# Altium PCB cps.PcbDoc
Units mm, origin at the board's own origin, x right, y up, seen from the top; angles counter-clockwise.
Board outline 54 x 58 mm, 2 copper layers (Top Layer, Bottom Layer); 6 components, 5 nets, 34 pads, 0 vias.
Unrouted connection lines stored in the file: 2.
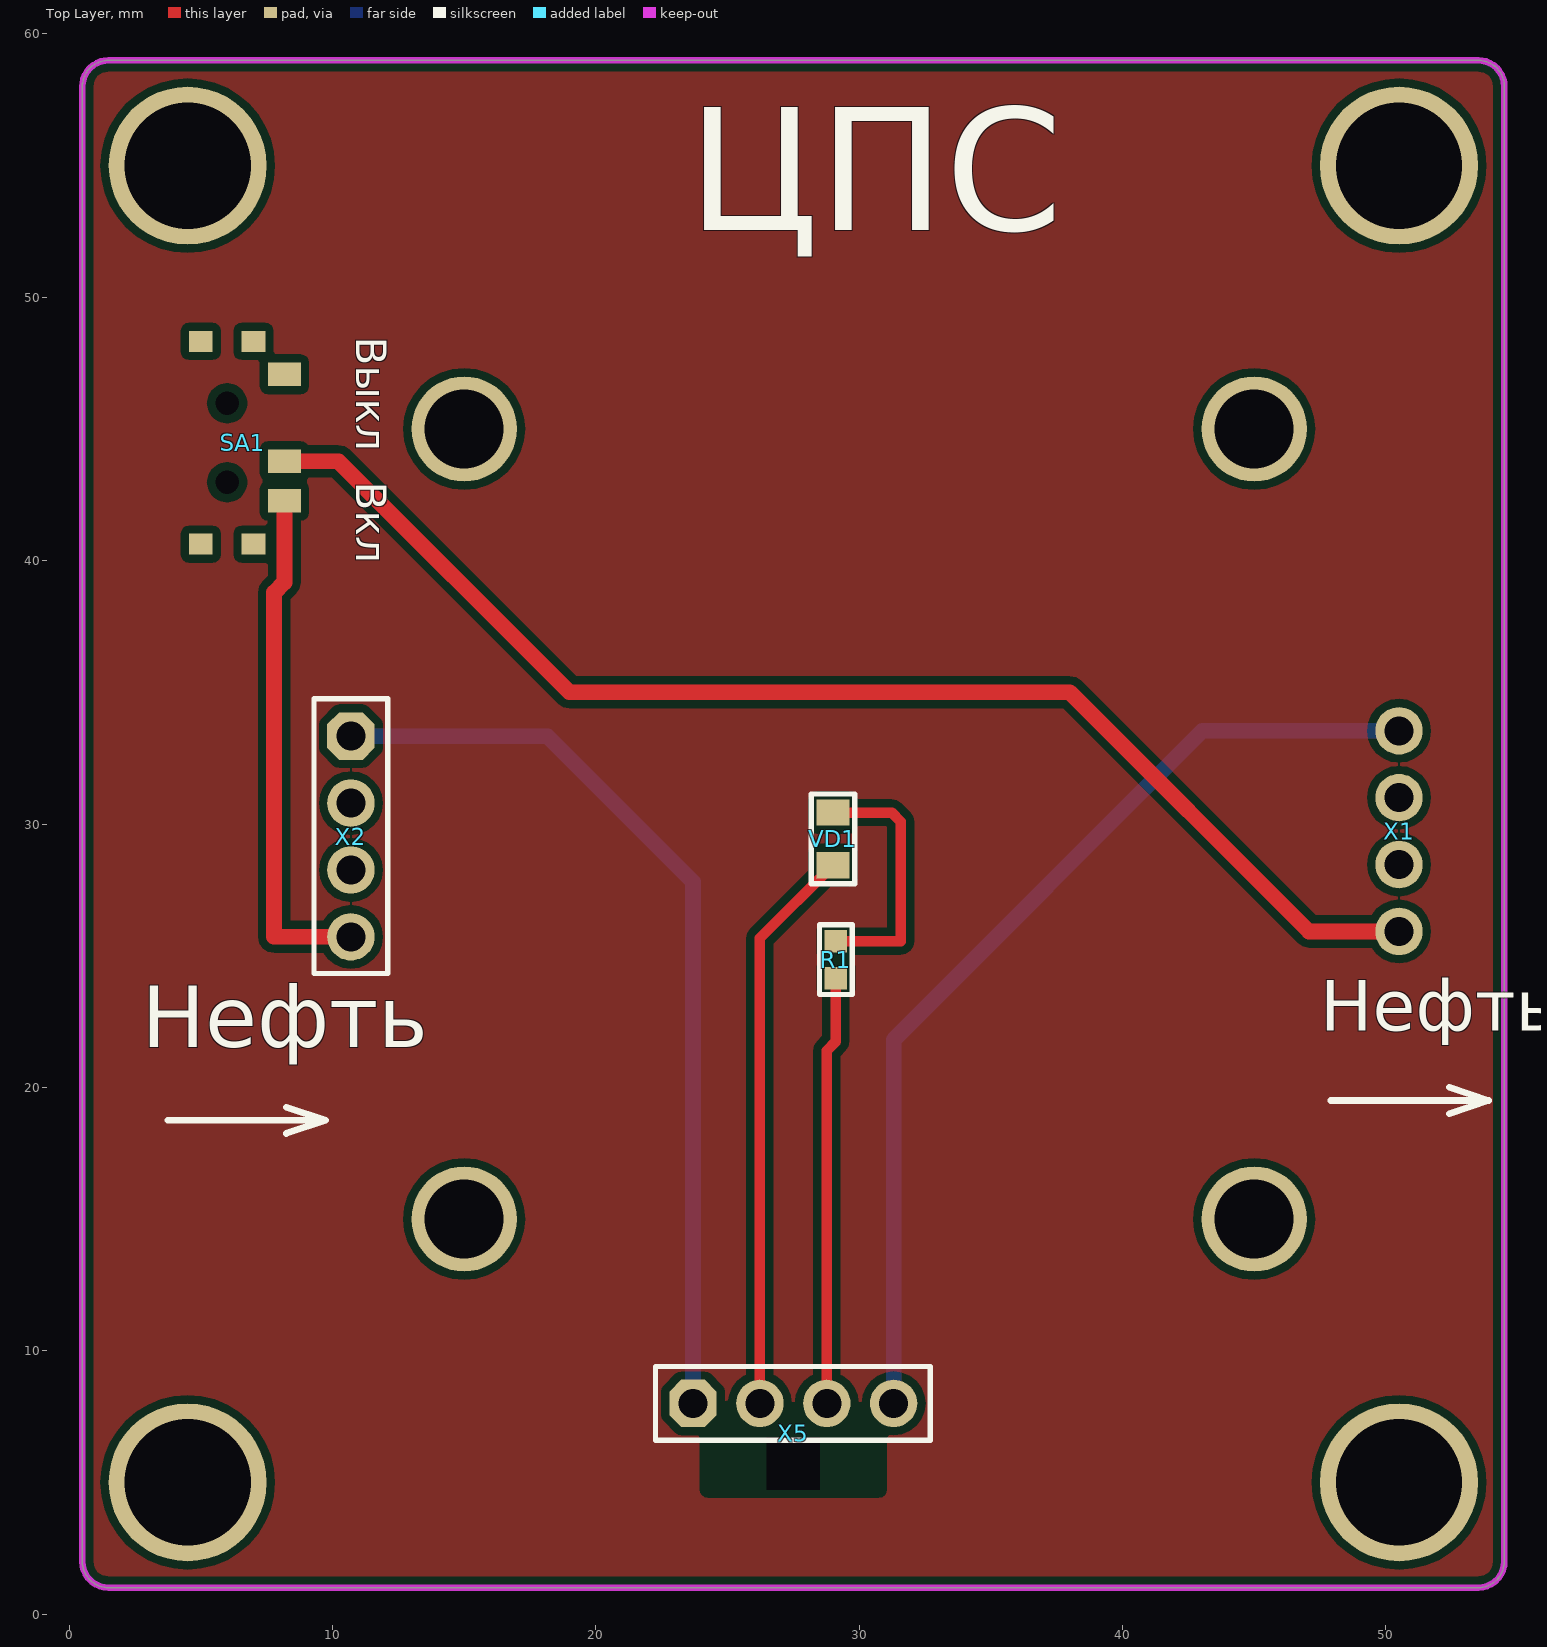
[diagram p0: Top Layer view]
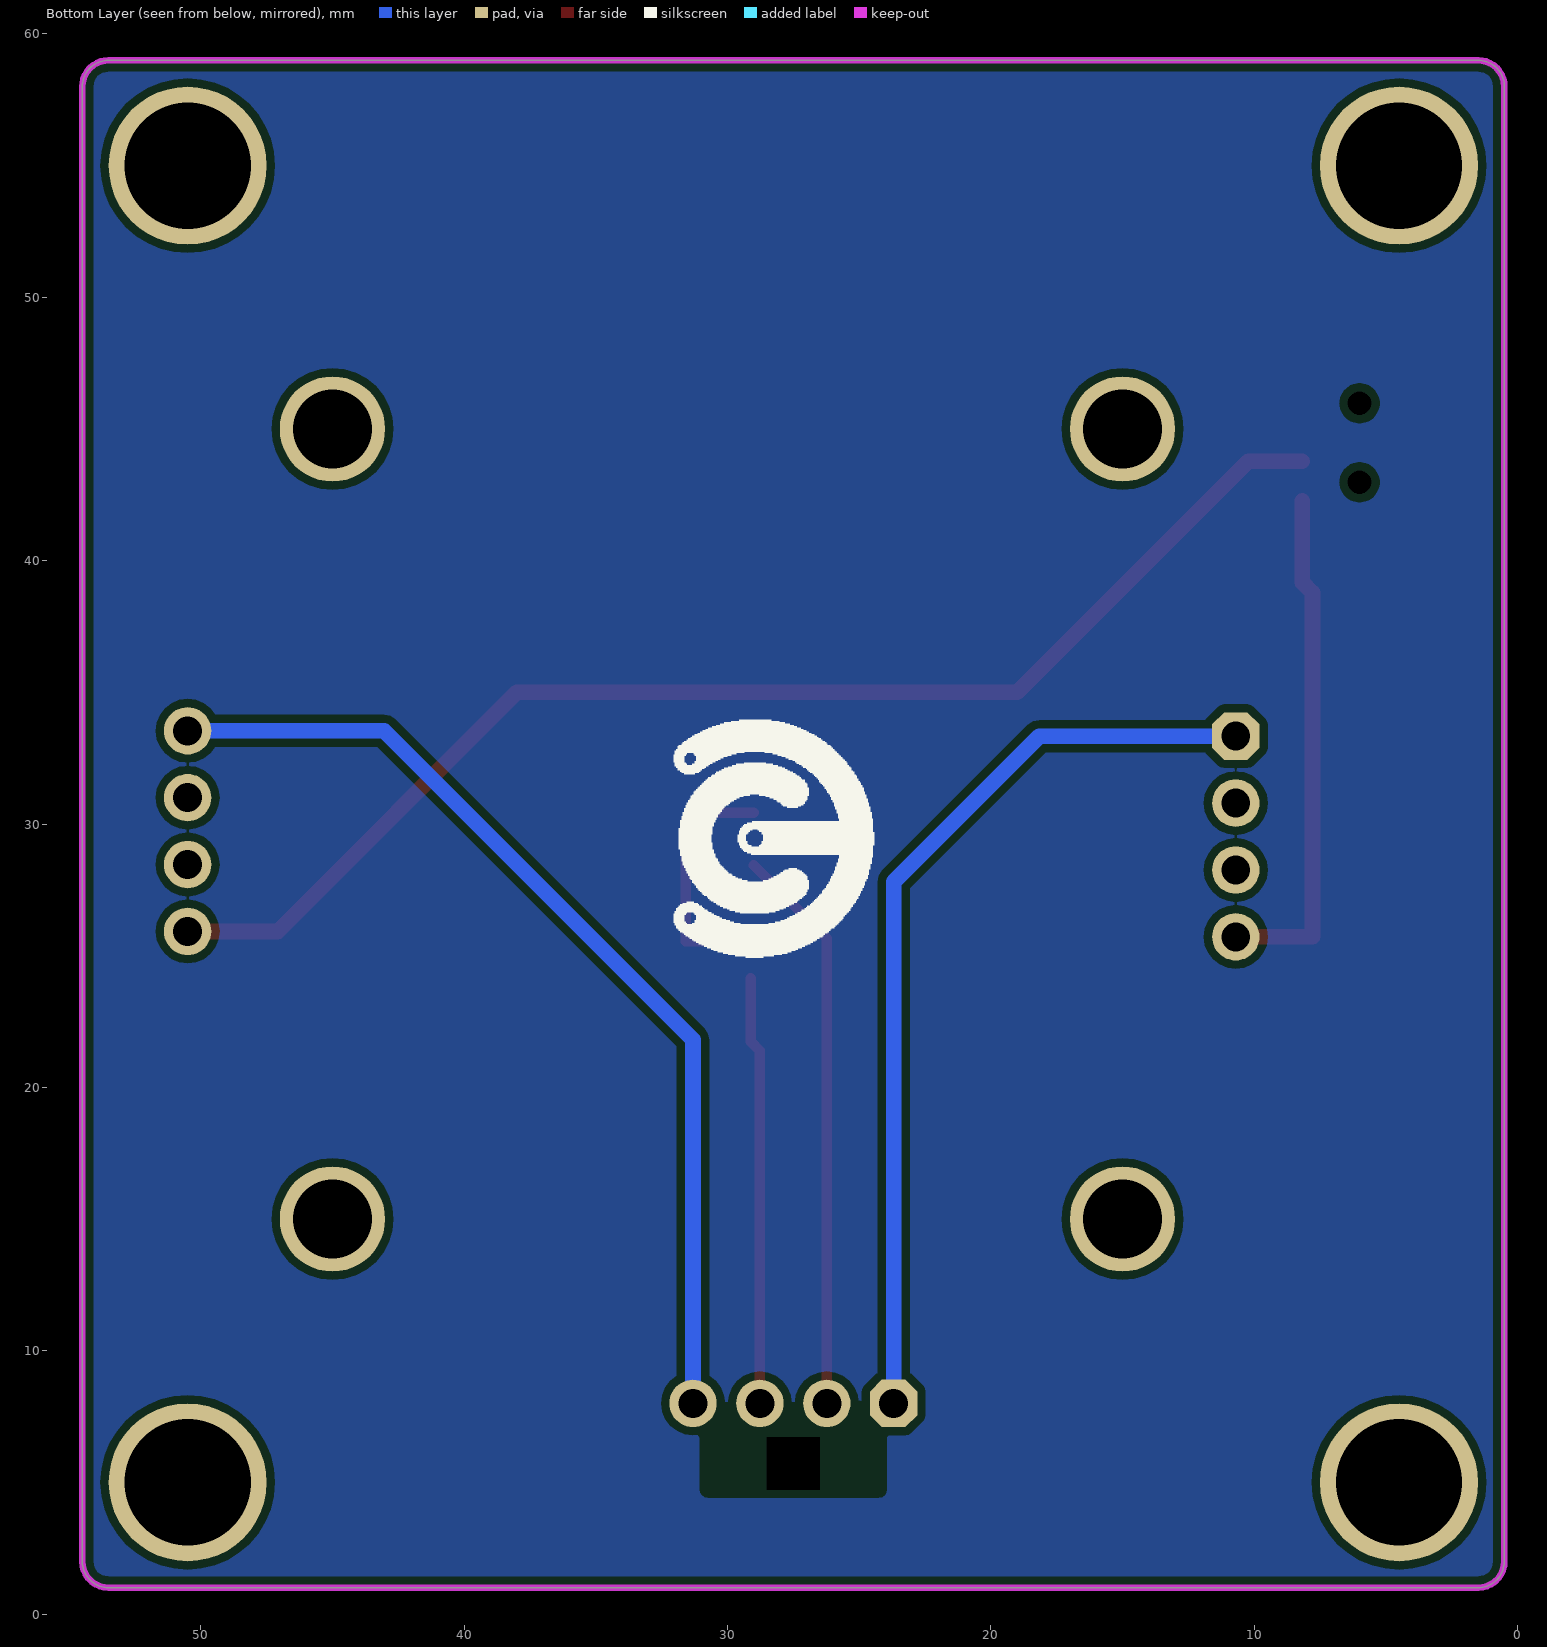
[diagram p1: Bottom Layer view, seen from below]

## Layer stack, top to bottom
Top Solder: solder mask 0.0102, Solder Resist, Dk 3.5
Top Layer: signal copper 0.0356
Dielectric 1: dielectric 0.32, FR-4, Dk 4.8
Bottom Layer: signal copper 0.0356
Bottom Solder: solder mask 0.0102, Solder Resist, Dk 3.5

## Board outline
0.5,2 0.5,58 cw(c1.5,58) 1.5,59 53.5,59 cw(c53.5,58) 54.5,58 54.5,2 cw(c53.5,2) 53.5,1 1.5,1 cw(c1.5,2)

## Design rules (kind name [scope] priority, off if disabled: settings)
Clearance [All] p1: gap=0.3 ignorepadtopadclearanceinfootprint=FALSE
PolygonConnect [All] p1: connectstyle=Relief reliefconductorwidth=0.254 reliefentries=4 polygonreliefangle="90 Angle" airgapwidth=0.254
RoutingVias [All] p1: holewidth=0.711 width=1.27 viastyle="Through Hole" minholewidth=0.711 minwidth=1.27 maxholewidth=0.711 maxwidth=1.27
SolderMaskExpansion [All] p1: expansion=0.102
Width [All] p1: maxlimit=10 minlimit=0.254 preferedwidth=0.254 minimp=50.000000 maximp=50.000000 favimp=50.000000
30 further rules are at their usual default settings.

## Components (designator, comment, footprint, x,y, rotation, side; value= is the part's Value field where it differs from the comment)
R1 "Resistor film, 100R, ±5%, 0603, 0.1W, -55...+125°C" "RES: 0603" 29.116,24.847 r270 top value=100R
SA1 "SS-3292S-L1" SS-3292S-L1 6,44.5 r180 top
VD1 "LED, *, *, *, -55...+150°C" "LED: 0805G" 29.005,29.436 r270 top
X1 "Connector, 4pin, 2.54mm, 500VAC, 3A" "4PLS RIGHT ANGLE 2" 50.5,29.73 r270 top
X2 "Connector, 4pin, 2.54mm, 500VAC, 3A" "CON: PBS-4 R" 10.7,29.525 r270 top
X5 "PBS-4 cut" "PBS-4 CUT" 27.5,8 r0 top

## Footprints (in the part's own frame and the unit in brackets; to place one, negate y for a bottom-side part, rotate by r counter-clockwise, add the part's x,y. Pads: shape width x height; smd on the part's side, far side on the other; paste and mask are expansions set on the pad)
"4PLS RIGHT ANGLE 2" [mm]
  round 1.8 hole 1.1: 1(-3.81,0) 2(-1.27,0) 3(1.27,0) 4(3.81,0)
  body extent -5.04,-0.32 5.14,10.04, height 2.57
"CON: PBS-4 R" [mm] "PBS-5"
  oct 1.8x1.8 hole 1.1: 1(-3.81,0)
  round 1.8 hole 1.1: 2(-1.27,0) 3(1.27,0) 4(3.81,0)
  silkscreen extent -5.23,-1.4 5.2,1.4, body extent -5.08,-10.2 5.08,0, height 2.54
"LED: 0805G" [mm]
  rect 1x1.25 smd: 1(-1,0) 2(1,0)
  silkscreen extent -1.7,-0.82 1.7,0.82, body extent -1.05,-0.67 1.05,0.68, height 0.9
"PBS-4 CUT" [mm]
  oct 1.8x1.8 hole 1.1: 1(-3.81,0)
  round 1.8 hole 1.1: 2(-1.27,0) 3(1.27,0) 4(3.81,0)
  rrect50% 0x0 hole 2 square: ""(0,-2.28)
  silkscreen extent -5.23,-1.4 5.2,1.4, body extent -5.08,-1.27 5.08,1.27, height 8.4
"RES: 0603" [mm]
  rect 0.85x0.85 smd: 1(-0.7,0) 2(0.7,0)
  silkscreen extent -1.33,-0.63 1.33,0.63, body extent -0.8,-0.4 0.8,0.4, height 0.44
SS-3292S-L1 [mm]
  rect 1.25x0.9 smd: 1(-2.175,-2.576) 2(-2.175,0.724) 3(-2.175,2.224)
  rect 0.9x0.8 smd: ""(-1,3.874) ""(-1,-3.826) ""(1,3.874) ""(1,-3.826)
  round 0 hole 0.9 unplated: ""(0,1.524) ""(0,-1.476)
  body extent -1.52,-4.32 1.52,4.44, height 6

## Part data
R1: library part Resistor_0603, Manufacturer=Yageo, Package=0603, PartNumber=RC0603JR-07100RL, Power=0.1W, Temperature=-55...+125°C, Tolerance=±5%, TypeResistor="Resistor film", HelpURL=https://www.digikey.com/product-detail/en/yageo/RC0603JR-07100RL/311-100GRCT-ND/729644, ValueManufacturerPartNumber="Resistor film, 100R, ±5%, 0603, 0.1W, -55...+125°C"
VD1: library part LED_single, Color=GREEN, Temperature=-55...+150°C, TypeDiode=LED, ValueManufacturerPartNumber="LED, *, *, *, -55...+150°C"
X1: library part PLS-4, CurrentMax=3A, Manufacturer=Connfly, VoltageMax=500VAC, CommentText="\"Разъем\"", HelpURL=https://www.chipdip.ru/product/pls-4, Multichannel=4pin, PartNumber=PLS-4, Pitch=2.54mm, TypeConnector=Connector, ValueManufacturerPartNumber="Connector, 4pin, 2.54mm, 500VAC, 3A"
X2: library part PBS-4, CurrentMax=3A, Manufacturer=Connfly, VoltageMax=500VAC, CommentText="\"Разъем\"", HelpURL=https://www.chipdip.ru/product/pbs-4, Multichannel=4pin, PartNumber=PBS-4, Pitch=2.54mm, TypeConnector=Connector, ValueManufacturerPartNumber="Connector, 4pin, 2.54mm, 500VAC, 3A"

## Free pads (board coordinates)
  round 6 hole 4.8: ""(4.5,5) ""(4.5,55) ""(50.5,5) ""(50.5,55)
  round 4 hole 3: ""(15,15) ""(15,45) ""(45,15) ""(45,45)

## Nets (pads, with @x,y where several pads share a name; then routed paths per layer and width w, separated by ;. In a path a pad name is that pad's centre, name@x,y a point inside that pad or via, vN(x,y) a via of type N, cw(c..) or ccw(c..) an arc to the next point about the centre after c; other vN are vias at no path point)
GND: VD1.2 X1.1 X2.1 X5.1 X5.2 X5.4 | length 94.5
  Top Layer w0.4: X5.2 26.23,25.661 VD1.2
  Bottom Layer w0.6: X2.1 18.165,33.335 23.69,27.81 X5.1 ; X5.4 31.31,21.81 43.04,33.54 X1.1
NetR1_1: R1.1 VD1.1 | length 9.7
  Top Layer w0.4: VD1.1 31.232,30.436 31.581,30.087 31.581,25.547 R1.1
NetSA1_2: SA1.2 X1.4 | length 49.7
  Top Layer w0.6: SA1.2 10.224,43.776 19,35 38,35 47.08,25.92 X1.4
NetSA1_3: SA1.3 X2.4 | length 19.6
  Top Layer w0.6: SA1.3 8.175,39.175 7.785,38.785 7.785,25.715 X2.4
VCC: R1.2 X5.3 | length 16.3
  Top Layer w0.4: X5.3 28.77,21.395 29.116,21.741 R1.2
pads on no net: SA1. SA1.1 X1.2 X1.3 X2.2 X2.3 X5.

## Polygon pours and split planes (outlines as drawn)
no net on Top Layer "Top Layer-No Net" (solid, pour order 2): 0.5,2 0.5,58 cw(c1.5,58) 1.5,59 53.5,59 cw(c53.5,58) 54.5,58 54.5,2 cw(c53.5,2) 53.5,1 1.5,1 cw(c1.5,2)
no net on Bottom Layer "Top Layer-No Net1" (solid, pour order 3): 0.5,2 0.5,58 cw(c1.5,58) 1.5,59 53.5,59 cw(c53.5,58) 54.5,58 54.5,2 cw(c53.5,2) 53.5,1 1.5,1 cw(c1.5,2)

## Keep-outs
Keep-Out Layer:
  the board outline again, w0.254

## Silkscreen, mask and mechanical layers (free items; w line width, h text height)
Top Overlay:
  lines w0.254: 3.75,18.75 9.75,18.75 ; 8.25,18.25 9.75,18.75 ; 8.25,19.25 9.75,18.75 ; 47.908,19.5 53.908,19.5 ; 52.408,19 53.908,19.5 ; 52.408,20 53.908,19.5
  text "ЦПС" at 23.5,51 h8
  text "Выкл" at 10.5,48.5 h2 r270
  text "Вкл" at 10.5,43 h2 r270
  text "Нефть" at 47.5,21.5 h3.3
  text "Нефть" at 2.75,20.75 h4
Bottom Overlay:
  drawing of 376 lines, arcs and shapes, not listed